# Altium PCB clock-3key.PcbDoc
Units mm, origin at the board's own origin, x right, y up, seen from the top; angles counter-clockwise.
Board outline 151 x 86.38 mm, 2 copper layers (Top Layer, Bottom Layer); 77 components, 72 nets, 199 pads, 0 vias.
Unrouted connection lines stored in the file: 3.
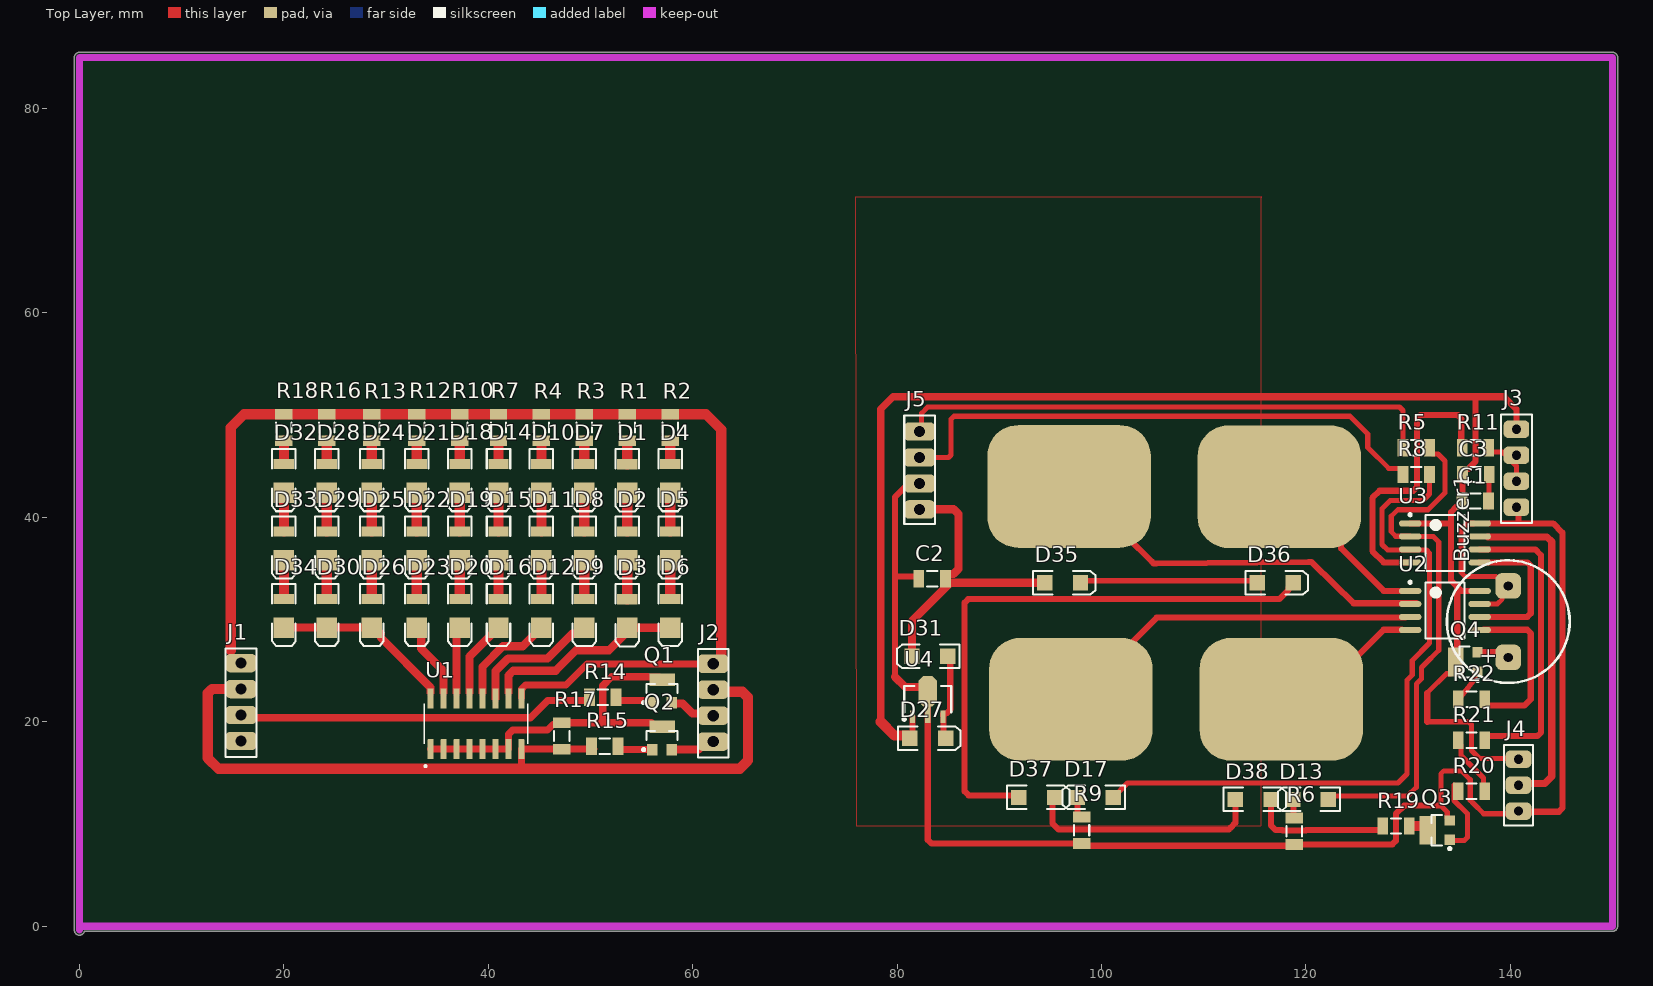
[diagram p0: Top Layer view]
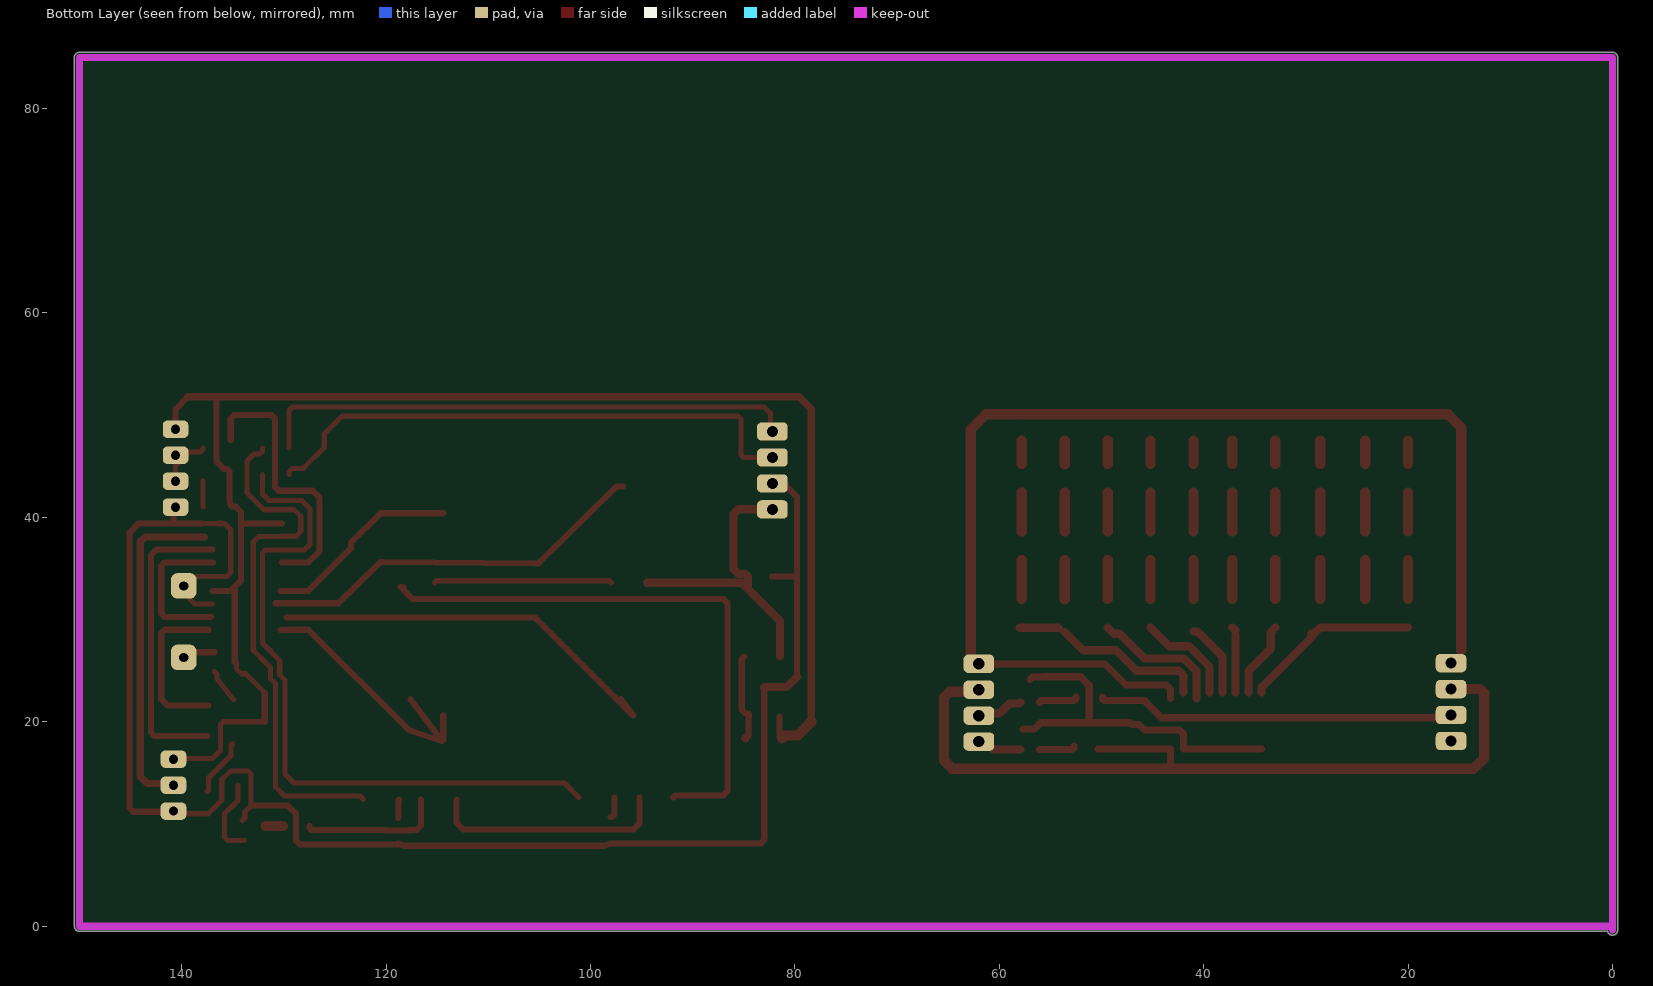
[diagram p1: Bottom Layer view, seen from below]

## Layer stack, top to bottom
Top Solder: solder mask 0.0102, Solder Resist, Dk 3.5
Top Layer: signal copper 0.0356
Dielectric 1: dielectric 0.32, FR-4, Dk 4.8
Bottom Layer: signal copper 0.0356
Bottom Solder: solder mask 0.0102, Solder Resist, Dk 3.5

## Board outline
-0.5,-0.381 -0.5,85 cw(c0,85) 0,85.5 150,85.5 cw(c150,85) 150.5,85 150.5,0 cw(c150,0) 150,-0.5 0.486,-0.5 cw(c0,-0.381)

## Design rules (kind name [scope] priority, off if disabled: settings)
Clearance Clearance_1 [InPolygon] p1: gap=1 ignorepadtopadclearanceinfootprint=FALSE
Clearance [All] p2: gap=0.4 ignorepadtopadclearanceinfootprint=FALSE
PolygonConnect [All] p1: connectstyle=Relief reliefconductorwidth=0.254 reliefentries=4 polygonreliefangle="90 Angle" airgapwidth=0.254
RoutingLayers [All] p1: top layer_v5=FALSE bottom layer_v5=TRUE
RoutingVias [All] p1: holewidth=0.711 width=2.5 viastyle="Through Hole" minholewidth=0.711 minwidth=1.27 maxholewidth=0.711 maxwidth=2
SolderMaskExpansion [All] p1: expansion=0.102 istentingtop=FALSE
SupplyNets "Schematic Supply Nets_1" [InNet('vcc')] p1: voltage=0.000
SupplyNets "Schematic Supply Nets" [InNet('GND')] p2: voltage=0.000
Width [All] p1: maxlimit=3 minlimit=0.4 preferedwidth=1
29 further rules are at their usual default settings.

## Components (designator, comment, footprint, x,y, rotation, side; value= is the part's Value field where it differs from the comment)
Buzzer1 "Buzzer" BUZZER 139.8,29.8 r90 top
C1 "=Value" "CAP 1206" 136.6,41.6 r180 top
C2 "=Value" "CAP 1206" 83.4,34 r0 top
C3 "=Value" "CAP 1206" 136.6,44.2 r0 top
D1 "LED2" 3.2X1.6X1.1#1 53.6,43.777 r270 top
D2 "LED2" 3.2X1.6X1.1#1 53.6,37.2 r270 top
D3 "LED2" 3.2X1.6X1.1#1 53.6,30.577 r270 top
D4 "LED2" 3.2X1.6X1.1#1 57.8,43.8 r270 top
D5 "LED2" 3.2X1.6X1.1#1 57.8,37.2 r270 top
D6 "LED2" 3.2X1.6X1.1#1 57.8,30.6 r270 top
D7 "LED2" 3.2X1.6X1.1#1 49.4,43.8 r270 top
D8 "LED2" 3.2X1.6X1.1#1 49.4,37.2 r270 top
D9 "LED2" 3.2X1.6X1.1#1 49.4,30.6 r270 top
D10 "LED2" 3.2X1.6X1.1#1 45.2,43.8 r270 top
D11 "LED2" 3.2X1.6X1.1#1 45.2,37.2 r270 top
D12 "LED2" 3.2X1.6X1.1#1 45.2,30.6 r270 top
D13 "LED2" 3.2X1.6X1.1#2 120.45,12.4 r180 top
D14 "LED2" 3.2X1.6X1.1#1 41,43.8 r270 top
D15 "LED2" 3.2X1.6X1.1#1 41,37.2 r270 top
D16 "LED2" 3.2X1.6X1.1#1 41,30.6 r270 top
D17 "LED2" 3.2X1.6X1.1#2 99.4,12.6 r180 top
D18 "LED2" 3.2X1.6X1.1#1 37.2,43.8 r270 top
D19 "LED2" 3.2X1.6X1.1#1 37.2,37.2 r270 top
D20 "LED2" 3.2X1.6X1.1#1 37.2,30.6 r270 top
D21 "LED2" 3.2X1.6X1.1#1 33,43.8 r270 top
D22 "LED2" 3.2X1.6X1.1#1 33,37.2 r270 top
D23 "LED2" 3.2X1.6X1.1#1 33,30.6 r270 top
D24 "LED2" 3.2X1.6X1.1#1 28.6,43.8 r270 top
D25 "LED2" 3.2X1.6X1.1#1 28.6,37.2 r270 top
D26 "LED2" 3.2X1.6X1.1#1 28.6,30.6 r270 top
D27 "D Tunnel1" 3.2X1.6X1.1#2 83,18.4 r0 top
D28 "LED2" 3.2X1.6X1.1#1 24.2,43.8 r270 top
D29 "LED2" 3.2X1.6X1.1#1 24.2,37.2 r270 top
D30 "LED2" 3.2X1.6X1.1#1 24.2,30.6 r270 top
D31 "D Tunnel1" 3.2X1.6X1.1#2 83.2,26.4 r180 top
D32 "LED2" 3.2X1.6X1.1#1 20,43.8 r270 top
D33 "LED2" 3.2X1.6X1.1#1 20,37.2 r270 top
D34 "LED2" 3.2X1.6X1.1#1 20,30.6 r270 top
D35 "LED2" 3.2X1.6X1.1#2 96.2,33.6 r0 top
D36 "LED2" 3.2X1.6X1.1#2 117,33.6 r0 top
D37 "LED2" 3.2X1.6X1.1#2 93.65,12.6 r0 top
D38 "LED2" 3.2X1.6X1.1#2 114.85,12.4 r0 top
J1 "Header4X1" "HEADER 4X1"#1 15.8,25.74 r270 top
J2 "Header4X1" "HEADER 4X1"#1 62,25.68 r270 top
J3 "Header4X1" "HEADER 4X1"#2 140.6,48.62 r270 top
J4 "Header3X1" "HEADER 3X1" 140.8,16.34 r270 top
J5 "Header4X1" "HEADER 4X1"#1 82.2,40.78 r90 top
Q1 "PNP" SOT-23B_N 57,23 r90 top
Q2 "PNP" SOT-23B_N 57,18.4 r90 top
Q3 "QNPN" SOT-23B_L#1 133,9.4 r180 top
Q4 "QNPN" SOT-23B_L#2 135.725,25.85 r180 top
R1 "10K" "RES 1206 (3216X08L)" 53.6,48.8 r270 top
R2 "10K" "RES 1206 (3216X08L)" 57.8,48.8 r270 top
R3 "10K" "RES 1206 (3216X08L)" 49.4,48.8 r270 top
R4 "10K" "RES 1206 (3216X08L)" 45.2,48.8 r270 top
R5 "10K" "RES 1206 (3216X08L)" 130.8,46.8 r180 top
R6 "10K" "RES 1206 (3216X08L)" 118.85,9.301 r270 top
R7 "10K" "RES 1206 (3216X08L)" 41,48.8 r270 top
R8 "10K" "RES 1206 (3216X08L)" 130.8,44.2 r180 top
R9 "10K" "RES 1206 (3216X08L)" 98.05,9.4 r270 top
R10 "10K" "RES 1206 (3216X08L)" 37.2,48.8 r270 top
R11 "10K" "RES 1206 (3216X08L)" 136.6,46.8 r0 top
R12 "10K" "RES 1206 (3216X08L)" 33,48.8 r270 top
R13 "10K" "RES 1206 (3216X08L)" 28.6,48.8 r270 top
R14 "10K" "RES 1206 (3216X08L)" 51.2,22.4 r0 top
R15 "10K" "RES 1206 (3216X08L)" 51.4,17.6 r0 top
R16 "10K" "RES 1206 (3216X08L)" 24.2,48.8 r270 top
R17 "10K" "RES 1206 (3216X08L)" 47.2,18.6 r90 top
R18 "10K" "RES 1206 (3216X08L)" 20,48.8 r270 top
R19 "10K" "RES 1206 (3216X08L)" 128.8,9.8 r0 top
R20 "10K" "RES 1206 (3216X08L)" 136.2,13.2 r180 top
R21 "10K" "RES 1206 (3216X08L)" 136.2,18.2 r180 top
R22 "10K" "RES 1206 (3216X08L)" 136.2,22.2 r180 top
U1 "ULN2003ADRG4" SOIC127P600X175-16N 38.8,19.8 r90 top
U2 "ATtiny15L-1SC" 8S2_N 133.6,30.895 r0 top
U3 "ATtiny15L-1SC" 8S2_N 133.6,37.505 r0 top
U4 "LM1117MP-3.3" SOT89L 83,22.2 r90 top

## Footprints (in the part's own frame and the unit in brackets; to place one, negate y for a bottom-side part, rotate by r counter-clockwise, add the part's x,y. Pads: shape width x height; smd on the part's side, far side on the other; paste and mask are expansions set on the pad)
3.2X1.6X1.1#1 [mm] "SMT LED; 2 Flat Leads"
  rect 1x2 smd: 1(-1.423,0)
  rect 2x2 smd: 2(1.377,0)
  silkscreen extent -2.9,-1.15 3.2,1.15
3.2X1.6X1.1#2 [mm] "SMT LED; 2 Flat Leads"
  rect 1.5x1.5 smd: 1(-1.75,0) 2(1.75,0)
  silkscreen extent -2.9,-1.15 3.2,1.15
8S2_N [mm] "SOP, 8-Leads, Body 5.3x5.3mm, Pitch 1.27mm, IPC Medium Density"
  oval 2.2x0.6 smd: 1(-3.4,1.905) 2(-3.4,0.635) 3(-3.4,-0.635) 4(-3.4,-1.905) 5(3.4,-1.905) 6(3.4,-0.635) 7(3.4,0.635) 8(3.4,1.905)
  silkscreen extent -3.52,-2.75 1.9,2.88, body extent -2.73,-2.75 2.73,2.75, height 2.16
BUZZER [mm] "BUZZER"
  rrect50% 2.5x2.5 hole 0.9: 1(-3.5,0) 2(3.5,0)
  silkscreen extent -6,-6 6,6
"CAP 1206" [mm]
  rect 1.05x1.7 smd: 1(-1.27,0) 2(1.326,0)
  silkscreen extent -0.47,-0.75 0.53,0.75, body extent -1.49,-0.77 1.55,0.75, height 0.75
"HEADER 3X1" [mm]
  rrect50% 1.7x2.5 hole 0.9: 1(0,0) 2(2.54,0) 3(5.08,0)
  silkscreen extent -1.4,-1.4 6.48,1.4, body extent -1.24,-1.27 6.38,1.27, height 8.38
"HEADER 4X1"#1 [mm]
  rrect50% 1.8x3 hole 1.1: 1(0,0) 2(2.54,0) 3(5.08,0) 4(7.62,0)
  silkscreen extent -1.43,-1.5 9.18,1.5, body extent -1.19,-1.22 8.97,1.32, height 8.38
"HEADER 4X1"#2 [mm]
  rrect50% 1.7x2.5 hole 0.9: 1(0,0) 2(2.54,0) 3(5.08,0) 4(7.62,0)
  silkscreen extent -1.43,-1.5 9.18,1.5, body extent -1.19,-1.22 8.97,1.32, height 8.38
"RES 1206 (3216X08L)" [mm] "Chip Resistor, 2-Leads, Body 3.2x1.6mm, IPC High Density _ (0.125 W)"
  rect 1.05x1.7 smd: 1(-1.295,0) 2(1.301,0)
  silkscreen extent -0.5,-0.75 0.5,0.75, body extent -1.52,-0.76 1.53,0.76, height 0.6
SOIC127P600X175-16N [mm]
  rrect25% 1.97x0.6 smd: 1(-2.475,4.445) 2(-2.475,3.175) 3(-2.475,1.905) 4(-2.475,0.635) 5(-2.475,-0.635) 6(-2.475,-1.905) 7(-2.475,-3.175) 8(-2.475,-4.445) 9(2.475,-4.445) 10(2.475,-3.175) 11(2.475,-1.905) 12(2.475,-0.635) 13(2.475,0.635) 14(2.475,1.905) 15(2.475,3.175) 16(2.475,4.445)
  silkscreen extent -4.24,-5.06 1.95,5.06
SOT89L [mm] "SOT89, 3-Leads, Body 4.5x2.4 mm, Pitch 1.5mm, Lead Span 4.1mm, IPC High Density"
  rect 1.2x0.5 smd: 1(-1.7,1.5) 3(-1.7,-1.5)
  rect 1.6x0.5 smd: 2(-1.5,0)
  oct 3x1.8 smd: 2(0.8,0)
  silkscreen extent -2.07,-2.3 1.3,2.42, body extent -1.3,-2.3 1.3,2.3, height 1.6
SOT-23B_L#1 [mm] "SOT23, 3-Leads, Body 2.9x1.3mm, Pitch 0.95mm, Lead Span 2.4mm, IPC High Density"
  rect 1x1 smd: 1(-1.075,0.95) 2(-1.075,-0.95)
  rect 1.6x2.8 smd: 3(1.075,0)
  silkscreen extent -1.2,-1.5 0.7,1.92, body extent -0.7,-1.5 0.7,1.5, height 1.14
SOT-23B_L#2 [mm] "SOT23, 3-Leads, Body 2.9x1.3mm, Pitch 0.95mm, Lead Span 2.4mm, IPC High Density"
  rect 1x1 smd: 1(-1.075,0.95) 2(-1.075,-0.95)
  rect 1.5x2.8 smd: 3(1.075,0)
  silkscreen extent -1.2,-1.5 0.7,1.92, body extent -0.7,-1.5 0.7,1.5, height 1.14
SOT-23B_N [mm] "SOT23, 3-Leads, Body 2.9x1.3mm, Pitch 0.95mm, Lead Span 2.4mm, IPC Medium Density"
  rect 1.15x1 smd: 1(-1.125,0.95) 2(-1.125,-0.95)
  rect 1.2x2.5 smd: 3(1.125,0)
  silkscreen extent -1.25,-1.5 0.7,1.92, body extent -0.7,-1.5 0.7,1.5, height 1.14

## Part data
C1 C2 C3: library part Capacitor, "Capacitor"
D1 D2 D3 D4 D5 D6 D7 D8 D9 D10 D11 D12 D13 D14 D15 D16 D17 D18 D19 D20 D21 D22 D23 D24 D25 D26 D28 D29 D30 D32 D33 D34 D35 D36 D37 D38: "Typical RED, GREEN, YELLOW, AMBER GaAs LED", LatestRevisionDate=17-Jul-2002, LatestRevisionNote="Re-released for DXP Platform.", PackageDescription="SM LED; 2 Flat Leads", PackageReference=3.2X1.6X1.1, PackageVersion=Feb-2002, Published=8-Jun-2000, Publisher="Altium Limited", Simulation ModelName=LED2, Simulation PortMap=(1:1),(2:2)
D27 D31: "Tunnel Diode - RLC Model", LatestRevisionDate=17-Jul-2002, LatestRevisionNote="Re-released for DXP Platform.", PackageDescription="SM LED; 2 Flat Leads", PackageReference=3.2X1.6X1.1, PackageVersion=Feb-2002, Published=8-Jun-2000, Publisher="Altium Limited", Simulation ModelName=DTUNNEL1, Simulation PortMap=(1:1),(2:2)
Q1 Q2: "PNP Bipolar Transistor", LatestRevisionDate=29-May-2009, LatestRevisionNote="IPC-7351 Footprint Added.", PackageDescription="3-Pin SOT-23 Package 0.95 mm Pitch, 2.4 mm Lead Span", PackageReference=SOT-23B, PackageVersion=Aug-1999, Published=8-Jun-2000, Publisher="Altium Limited", Simulation ModelName=PNP, Simulation PortMap=(1:1),(2:2),(3:3)
Q3 Q4: "NPN Bipolar Transistor", LatestRevisionDate=29-May-2009, LatestRevisionNote="IPC-7351 Footprint Added.", PackageDescription="3-Pin SOT-23 Package 0.95 mm Pitch, 2.4 mm Lead Span", PackageReference=SOT-23B, PackageVersion=Aug-1999, Published=8-Jun-2000, Publisher="Altium Limited", Simulation ModelName=QNPN, Simulation PortMap=(1:1),(2:2),(3:3)
R1 R2 R3 R4 R5 R6 R7 R8 R9 R10 R11 R12 R13 R14 R15 R16 R17 R18 R19 R20 R21 R22: library part Resistor, "Resistor", Power="1/4 W", Tolerance=5%, Simulation ModelName="Model Name", Simulation PortMap=(1:1),(2:2)
U1: "50-V, 7-ch darlington transistor array, -20C to 70C 16-SOIC -40 to 70", Package=None, Availability=Unavailable, MP=ULN2003ADRG4, Price=None
U2 U3: "8-Bit AVR Microcontroller with 1K Byte of Flash Memory", Supplier Part Number 1=ATTINY15L-1SC-ND, ComponentLink1Description=Datasheet, ComponentLink1URL=http://www.atmel.com/dyn/resources/prod_documents/doc1187.pdf, ComponentLink2Description="Atmel.com Home", ComponentLink2URL=http://www.atmel.com, DatasheetVersion=1187E-AVR-06/02, LatestRevisionDate=16-Oct-2006, LatestRevisionNote="IPC-7351 Footprint Added.", PackageDescription="8-Lead, 0.208\" Body, Plastic Small Outline Package (EIAJ)", PackageReference=8S2, PackageVersion="revF, Apr-2008", Published=17-Sep-2003, Publisher="Altium Limited", Supplier 1=Digi-Key, Supplier 2=Mouser, Supplier Part Number 2=556-ATTINY15L1SC
U4: "800mA Low-Dropout Linear Regulator", DigiKeyPartNumber=LM1117MP-3.3CT-ND, Manufacturer="National Semiconductor", PackageTopMarking=XYTT*N05A, PowerWise=N, Code_IPC=SOT223-4, Code_JEDEC=TO-261-AA, ComponentLink1Description="LM1117 Datasheet", ComponentLink1URL=http://www.national.com/ds/LM/LM1117.pdf, ComponentLink2Description="LM1117 Web Page", ComponentLink2URL=http://www.national.com/pf/LM/LM1117.html, ComponentLink3Description="MP04A Package Page", ComponentLink3URL=http://www.national.com/packaging/folders/mp04a.html, CompType="LDO IC", DatasheetVersion=Apr-2006, PackageDescription="Molded SOT-223, 6.50 x 3.56 x 1.6mm Body, 4 Lead, 2.3mm Pitch", PackageReference=MP04A, PackageVersion="revB, Apr-2003", PartNumber=LM1117MP-3.3, PinCount=4, Published=4-Dec-2008, Publisher="Altium Limited", RoHS=O
Buzzer1: ComponentLinkURL=www.picpars.com, Designer="Seyed Mohsen Ghasemain"

## Free pads (board coordinates)
  rrect50% 16x12 smd: 6(117.4,43) 7(96.821,43.026) 8(117.6,22.2) 9(97,22.2)

## Nets (pads, with @x,y where several pads share a name; then routed paths per layer and width w, separated by ;. In a path a pad name is that pad's centre, name@x,y a point inside that pad or via, vN(x,y) a via of type N, cw(c..) or ccw(c..) an arc to the next point about the centre after c; other vN are vias at no path point)
bizer: R22.1 U2.5 | length 16.1
  Top Layer w0.6: U2.5@137.364,29 141.649,29 142,28.649 142,22.2 141.4,21.6 R22.1@137.4,21.6
data: U2.6 U3.5 | length 14.9
  Top Layer w0.6: U3.5@136.919,35.6 141.649,35.6 142,35.249 142,30.611 141.649,30.26 U2.6@137.116,30.26
DATA_IN: R11.1 U3.4 | length 27.6
  Top Layer w0.6: U3.4 127.6,35.6 126.5,36.7 126.5,41.9 127.2,42.6 130.5,42.6 130.852,42.951 130.852,49.649 131.203,50 134.849,50 135.2,49.649 R11.1@135.2,47.564
DATA_OUT: J4.2 U3.7 | length 32.7
  Top Layer w0.7: U3.7@137.75,38.09 143.59,38.09 144.05,37.63 144.05,14.65 143.368,13.968 141.373,13.968 J4.2@141.205,13.8
GND: Buzzer1.2 C1.1 C2.1 C3.2 J1.2 J2.2 J3.4 J4.3 J5.2 Q3.2 R6.2 R9.2 R15.1 R17.1 U1.8 U2.7 U3.8 U4.2 | length 249.8
  Top Layer w0.5: Q3.2 133.832,10.593 133.832,11.168 133.2,11.8 133.2,14.907 133.493,15.2 135.2,15.2 136.074,14.326 136.074,12.327 136.4,12.001 ; 135.81,39.41 135.2,38.8 135.2,34.6 135.6,34.2 138.6,34.2 139.2,33.6 139.2,32 138.73,31.53 U2.7 ; U3.8@136.38,39.41 U3.8 U3.8@138,39.41 ; 136.4,12 137.4,11 140.54,11 J4.3 ; C1.1@137.87,41 137.926,41.056 C3.2@137.926,43.6
  Top Layer w0.6: 79.8,24.4 79.8,34.4 ; J5.2@81,43.2 79.8,42 79.8,34.4 ; C2.1@82.225,34.2 80,34.2 79.8,34.4 ; U4.2@83,23 83,20.7 83,8.451 83.351,8.099 R9.2 98.6,7.874 118.3,7.874 R6.2@118.815,8.085 ; R6.2 128.449,8 128.8,8.351 128.8,11 129.6,11.8 133.2,11.8 ; U3.8@136.046,39.4 U3.8@136.38,39.4 ; U3.8@138,39.41 140.8,39.41 ; J3.4 140.8,40.8 140.8,39.41 ; J4.3@141.2,11.2 144.749,11.2 145.1,11.551 145.1,38.5 144.19,39.41 140.8,39.41
  Top Layer w0.7: 43.245,15.4 U1.8 R15.1@50.335,17.325 ; J4.3@141.095,11.305 J4.3@141.2,11.2
  Top Layer w0.8: 79.8,24.4 80.8,23.4 U4.2@83,23.4 ; J5.2@81,43.2 J5.2@82.757,43.2
  Top Layer w1: J1.2@14.8,23.4 14.6,23.2 12.96,23.2 12.55,22.79 12.55,16.45 13.6,15.4 43.245,15.4 64.6,15.4 65.4,16.2 65.4,22.4 64.855,22.945 62.966,22.945 J2.2@62.8,23.112
l1: D3.2 D6.2 U1.10 | length 18.8
  Top Layer w0.8: U1.10@41.975,22.875 41.975,24.531 42.444,25 46.6,25 48.6,27 51.8,27 D3.2@53.6,28.8 ; D3.2@54.2,29.2 D6.2@58,29.2
l2: D9.2 U1.11 | length 13.1
  Top Layer w0.8: U1.11 40.705,24.958 41.947,26.2 45.8,26.2 48.223,28.623 48.8,28.623 D9.2
l3: D12.2 U1.12 | length 9.9
  Top Layer w0.8: U1.12@39.435,22.875 39.435,25.385 41.45,27.4 43.377,27.4 D12.2
l4: D16.2 U1.13 | length 7.4
  Top Layer w0.8: U1.13@38.165,22.875 38.165,26.388 40.6,28.823 D16.2@41,28.823
l5: D20.2 U1.14 | length 6.1
  Top Layer w0.8: U1.14@36.895,22.875 D20.2@36.895,28.518 ; D20.2@36.895,28.918 D20.2
l6: D23.2 U1.15 | length 7
  Top Layer w0.8: D23.2 33.437,28.786 33.437,27.563 ; 33.437,27.163 35.625,24.975 U1.15@35.625,22.875
l7: D26.2 D30.2 D34.2 U1.16 | length 17.1
  Top Layer w0.8: D34.2 D26.2 29.2,28.623 D26.2@29.492,28.623 ; D26.2@29.492,28.223 34.355,23.36 U1.16@34.355,22.875
led: R21.1 U3.6 | length 29.2
  Top Layer w0.6: U3.6 137.845,36.87 137.855,36.86 142.449,36.86 143,36.309 143,18.951 142.649,18.6 R21.1@137.495,18.6
NetBuzzer1_1: Buzzer1.1 Q4.2 | length 3.2
  Top Layer w0.6: Q4.2 139.3,26.8 Buzzer1.1
NetD1_1: D1.1 R1.2 | length 2.3
  Top Layer w1: D1.1 R1.2
NetD1_2: D1.2 D2.1 | length 3.8
  Top Layer w1: D2.1 D1.2
NetD2_2: D2.2 D3.1 | length 3.8
  Top Layer w1: D3.1 D2.2
NetD4_1: D4.1 R2.2 | length 2.3
  Top Layer w1: D4.1 R2.2
NetD4_2: D4.2 D5.1 | length 3.8
  Top Layer w1: D5.1 D4.2
NetD5_2: D5.2 D6.1 | length 3.8
  Top Layer w1: D6.1 D5.2
NetD7_1: D7.1 R3.2 | length 2.3
  Top Layer w1: D7.1 R3.2
NetD7_2: D7.2 D8.1 | length 3.8
  Top Layer w1: D8.1 D7.2
NetD8_2: D8.2 D9.1 | length 3.8
  Top Layer w1: D9.1 D8.2
NetD10_1: D10.1 R4.2 | length 2.3
  Top Layer w1: D10.1 R4.2
NetD10_2: D10.2 D11.1 | length 3.8
  Top Layer w1: D11.1 D10.2
NetD11_2: D11.2 D12.1 | length 3.8
  Top Layer w1: D12.1 D11.2
NetD13_1: D13.1 R5.1 U3.2 | length 52.1
  Top Layer w0.5: D13.1 122.55,12.75 129.95,12.75 130.8,13.6 130.8,23.7 131.3,24.2 131.3,25.3 131.6,25.6 133,27 133,37.6 132.46,38.14 U3.2 130.181,38.159 128.791,38.159 128.35,38.6 128.35,40.107 128.993,40.75 131.95,40.75 133.6,42.4 133.6,45.515 132.915,46.2 132.37,46.2 132.095,46.475 R5.1
NetD13_2: D13.2 R6.1 | length 1.9
  Top Layer w0.6: D13.2 118.775,12.325 118.775,10.671 R6.1
NetD14_1: D14.1 R7.2 | length 2.3
  Top Layer w1: D14.1 R7.2
NetD14_2: D14.2 D15.1 | length 3.8
  Top Layer w1: D15.1 D14.2
NetD15_2: D15.2 D16.1 | length 3.8
  Top Layer w1: D16.1 D15.2
NetD17_1: D17.1 R8.1 U3.3 | length 67.9
  Top Layer w0.5: D17.1 102.55,14 129,14 129.9,14.9 129.9,24.073 130.4,24.573 130.4,26 132.1,27.7 132.1,36.5 131.8,36.8 130.2,36.8 128,36.8 127.45,37.35 127.45,40.85 128.25,41.65 131.45,41.65 132.095,42.295 R8.1
NetD17_2: D17.2 R9.1 | length 2.2
  Top Layer w0.6: D17.2 97.65,10.92 97.875,10.695 R9.1
NetD18_1: D18.1 R10.2 | length 2.3
  Top Layer w1: D18.1 R10.2
NetD18_2: D18.2 D19.1 | length 3.8
  Top Layer w1: D19.1 D18.2
NetD19_2: D19.2 D20.1 | length 3.8
  Top Layer w1: D20.1 D19.2
NetD21_1: D21.1 R12.2 | length 2.3
  Top Layer w1: D21.1 R12.2
NetD21_2: D21.2 D22.1 | length 3.8
  Top Layer w1: D22.1 D21.2
NetD22_2: D22.2 D23.1 | length 3.8
  Top Layer w1: D23.1 D22.2
NetD24_1: D24.1 R13.2 | length 2.3
  Top Layer w1: D24.1 R13.2
NetD24_2: D24.2 D25.1 | length 3.8
  Top Layer w1: D25.1 D24.2
NetD25_2: D25.2 D26.1 | length 3.8
  Top Layer w1: D26.1 D25.2
NetD27_2: D27.2 D31.1 U4.3 | length 8.8
  Top Layer w0.6: U4.3 84.5,20.75 84.55,20.8 84.799,20.8 85.2,21.201 85.2,26.15 D31.1 ; D27.2@84.55,18.6 84.55,19.7 U4.3@84.55,20.5 ; D27.2@84.75,18.6 D27.2@84.925,18.425 ; D27.2@84.8,18.25 D27.2@84.95,18.4
NetD28_1: D28.1 R16.2 | length 2.3
  Top Layer w1: D28.1 R16.2
NetD28_2: D28.2 D29.1 | length 3.8
  Top Layer w1: D29.1 D28.2
NetD29_2: D29.2 D30.1 | length 3.8
  Top Layer w1: D30.1 D29.2
NetD32_1: D32.1 R18.2 | length 2.3
  Top Layer w1: D32.1 R18.2
NetD32_2: D32.2 D33.1 | length 3.8
  Top Layer w1: D33.1 D32.2
NetD33_2: D33.2 D34.1 | length 3.8
  Top Layer w1: D34.1 D33.2
NetD35_2: D35.2 D36.1 | length 17.5
  Top Layer w0.5: D35.2 98.15,33.8 115.05,33.8 D36.1
NetD36_2: D36.2 D37.1 | length 56.8
  Top Layer w0.6: D37.1 91.7,12.8 87,12.8 86.6,13.2 86.6,31.649 86.951,32 117.4,32 118.3,32.9 118.3,33.15 118.35,33.2 D36.2@118.6,33.2
NetD37_2: D37.2 D38.1 | length 23.3
  Top Layer w0.6: D37.2@95.2,12.6 95.2,10.05 95.604,9.646 95.78,9.47 112.47,9.47 112.646,9.646 113.1,10.1 D38.1
NetD38_2: D38.2 R19.1 | length 13.9
  Top Layer w0.6: D38.2 116.6,9.85 117.05,9.4 117.681,9.4 117.71,9.371 119.99,9.371 120.019,9.4 127.28,9.4 127.505,9.625 R19.1
NetJ1_3: J1.3 R14.1 | length 36.2
  Top Layer w0.7: J1.3@14.8,20.86 15.26,20.4 44.144,20.4 45.819,22.075 49.73,22.075 49.905,22.25 R14.1
NetJ3_2: J3.2 J3.3 R11.2 | length 6.5
  Top Layer w0.5: R11.2 137.901,46.675 138.176,46.4 139.228,46.4 ; J3.3 140.6,45.028 139.228,46.4 ; J3.2 140.28,46.4 139.228,46.4
NetQ1_2: Q1.1 R14.2 | length 3.9
  Top Layer w0.7: R14.2 52.501,22.25 52.676,22.075 55.9,22.075 56.05,21.925 Q1.1
NetQ2_2: Q2.1 R15.2 | length 3.6
  Top Layer w0.7: R15.2 52.701,17.45 52.876,17.275 Q2.1
NetQ3_1: Q3.3 R19.2 | length 1.7
  Top Layer w1: R19.2 Q3.3@131.8,9.8
NetQ3_2: Q3.1 R20.2 | length 7.7
  Top Layer w0.5: Q3.1@133.835,8.4 135.507,8.4 135.8,8.693 135.8,11 134.499,12.301 R20.2@134.499,13.8
NetQ4_2: Q4.1 R22.2 | length 3.4
  Top Layer w0.5: R22.2 134.981,22.21 136.55,24.212 136.55,24.65 Q4.1
NetR20_1: R20.1 R21.2 | length 5.7
  Top Layer w0.5: R21.2@135.02,17.879 135.174,17.725 135.174,16.698 137.366,14.507 137.366,13.329 R20.1
o1: J5.4 R5.2 | length 53.1
  Top Layer w0.5: J5.4@82.4,48.28 82.4,50.2 83,50.8 129.166,50.8 129.499,50.466 R5.2
o2: J5.3 R8.2 | length 53.4
  Top Layer w0.5: J5.3@83.066,45.866 85.031,45.866 85.266,46.1 85.266,49.607 85.559,49.9 124.3,49.9 126.05,48.15 126.05,46.843 128.093,44.8 129.174,44.8 129.499,44.475 R8.2
oo1: J2.4 Q2.2 | length 3.8
  Top Layer w0.8: Q2.2 60.588,17.275 61.345,18.032 J2.4@61.399,18.032
oo2: J2.3 Q1.2 | length 4.6
  Top Layer w0.8: Q1.2 58.049,21.776 59.024,21.776 59.983,20.817 61.783,20.817 J2.3
ouln: Q1.3 Q2.3 R17.2 U1.1 U1.2 U1.3 U1.4 U1.5 U1.6 U1.7 | length 35.3
  Top Layer w0.7: U1.1 U1.2 U1.3 U1.4 U1.5 U1.6 U1.7 41.975,18.785 42.39,19.2 45.8,19.2 46.326,19.726 47.025,19.726 R17.2 ; R17.2 55.975,19.9 56.566,19.309 Q2.3@57.691,19.309 ; 51.2,20 51.2,23.535 52.065,24.4 55.69,24.4 55.715,24.375 56.75,24.375 Q1.3
p1: pad.6 U2.1 | length 19.4
  Top Layer w0.6: pad.6@114.4,40.4 120.539,40.4 123.433,37.506 123.433,36.967 127.6,32.8 U2.1@130.332,32.8
p2: pad.7 U2.2 | length 38.7
  Top Layer w0.6: pad.7 97.161,43.035 97.41,43.038 104.941,35.662 105.115,35.491 105.364,35.491 120.279,35.647 120.527,35.647 120.702,35.475 124.659,31.6 U2.2@130.829,31.6
p3: pad.9 U2.3 | length 39.9
  Top Layer w0.6: pad.9 95.8,20.6 105.4,30.2 U2.3@129.721,30.2
p4: pad.8 U2.4 | length 27.6
  Top Layer w0.6: pad.8@114.4,18.2 pad.8@114.4,20.6 ; pad.8 114.528,18.104 117.8,19.2 127.6,29 129.39,29 129.4,28.99 U2.4@130.331,28.99
vcc: C1.2 C3.1 D27.1 J1.1 J2.1 J3.1 J4.1 Q4.3 R1.1 R2.1 R3.1 R4.1 R7.1 R10.1 R12.1 R13.1 R16.1 R18.1 U1.9 U2.8 U3.1 U4.1 | length 269.5
  Top Layer w0.5: 131.8,20 131.875,20 135.907,20 136.2,19.707 136.2,17.2 137,16.4 140.74,16.4 J4.1 ; 131.875,22.83 133.745,24.7 134.15,24.7 134.65,25.2 Q4.3
  Top Layer w0.6: D27.1@81.45,18.4 81.5,18.45 U4.1 ; U3.1 134.2,39.41 ; 131.875,20 131.875,22.83 ; Q4.3@134.8,25.85 134.8,33.2 ; C1.2 135.274,41.275 135.049,41.05 134.724,41.05 134.2,40.526 134.2,39.41 ; C1.2@135.33,41.6 C3.1 135.33,44.525 135.555,44.75 135.88,44.75 136.6,45.47 136.6,51.8 ; U2.8 135.2,32.8 134.8,33.2 ; 139.4,51.8 140.6,50.6 J3.1 ; 134.2,39.41 134.2,33.8 134.8,33.2
  Top Layer w0.7: U1.9 43.245,23.19 43.655,23.6 47.6,23.6 49.652,25.652 J2.1@62.8,25.652 ; 78.4,20 78.4,50.6 79.6,51.8 136.6,51.8 139.4,51.8
  Top Layer w1: 14.8,27 14.8,48.8 16.095,50.095 R13.1 R10.1 R7.1 R4.1 R3.1 R1.1 R2.1 ; R2.1@58.2,50.095 61.305,50.095 62.8,48.6 J2.1@62.8,25.652 ; 78.4,20 79.75,18.65 81,18.65 D27.1
vdd: C2.2 D31.2 D35.1 J5.1 | length 29.8
  Top Layer w0.8: D31.2 81.45,29.85 84.6,33 ; J5.1@82.665,40.8 85.531,40.8 86,40.331 86,34.935 85.531,34.467 85.32,34.467 85.303,34.45 84.851,34.45 84.601,34.2 84.601,33.082 84.6,33.081 84.6,33 ; D35.1 85.2,33.6 85.001,33.401 84.6,33
pads on no net: J1.4

## Polygon pours and split planes (outlines as drawn)
GND on Top Layer "NONET_L01_P024" (hatched 90Degree grid 0.5 track 0.2, shelved, pour order 24): 75.946,71.374 115.697,71.374 115.57,71.247 115.57,9.779 76.073,9.779

## Keep-outs
Keep-Out Layer:
  lines w0.7: 0,-0.381 0,85 150,85 150,0 0,0

## Silkscreen, mask and mechanical layers (free items; w line width, h text height)
Bottom Solder:
  lines w0.2: 11.8,14.2 11.8,52 66.2,52 66.2,14.2 11.8,14.2 ; 77.6,7.2 146.6,7.2 146.6,52.6 77.6,52.6 77.6,7.2

## Text inside footprints (layer, text, board x,y; h text height)
Buzzer1: Top Overlay "+" at 138.53,25.539 h1.52 r90